# EAGLE board CT_schematic (EAGLE 7.6.0)

Size 100 x 80 mm. Coordinates in mm from the lower left corner, seen from the top.
Outline: 0,0 100,0 100,80 0,80 0,0
Copper layers (1*16): Top 0.035mm / dielectric 1.5mm / Bottom 0.035mm
Design rules "default": minimum track width 10mil, minimum drill 24mil, track to track 8mil, track to pad 8mil, pad to pad 8mil, via to via 8mil, smd to smd 8mil, copper to edge 40mil, drill to drill 8mil, minimum pad ring 10mil, minimum via ring 8mil, stop-mask expansion 4mil, vias tented up to drill 0mil, thermal gap 10mil

## Footprints (pad centres in the part's own frame; a part is rotated, then mirrored left to right if it is on the bottom)
C0603 = smd 0.8 x 0.8: 1 -0.762,0; 2 0.762,0
C0402 = smd 0.5 x 0.5: 1 -0.508,0; 2 0.508,0
C0805 = smd 1.2 x 1.3: 1 -1.016,0; 2 1.016,0
C1210 = smd 1.2 x 2.5: 1 -1.524,0; 2 1.524,0
EXV-9H = smd 3.505 x 1.676: 1 -2.857,0; 2 2.857,0
L0603 = smd 0.8 x 0.8: 1 -0.762,0; 2 0.762,0
L1210 = smd 1.2 x 2.5: 1 -1.524,0; 2 1.524,0
PJ-037B_PACKAGE = drill 3.7 square: 1 12,0 | drill 3.2 square: 2 6,0
R0603 = smd 0.8 x 0.8: 1 -0.762,0; 2 0.762,0
LQFP64 = smd 0.3 x 1.2: 1 -3.75,-5.75; 2 -3.25,-5.75; 3 -2.75,-5.75; 4 -2.25,-5.75; 5 -1.75,-5.75; 6 -1.25,-5.75; 7 -0.75,-5.75; 8 -0.25,-5.75; 9 0.25,-5.75; 10 0.75,-5.75; 11 1.25,-5.75; 12 1.75,-5.75; 13 2.25,-5.75; 14 2.75,-5.75; 15 3.25,-5.75; 16 3.75,-5.75; 33 3.75,5.75; 34 3.25,5.75; 35 2.75,5.75; 36 2.25,5.75; 37 1.75,5.75; 38 1.25,5.75; 39 0.75,5.75; 40 0.25,5.75; 41 -0.25,5.75; 42 -0.75,5.75; 43 -1.25,5.75; 44 -1.75,5.75; 45 -2.25,5.75; 46 -2.75,5.75; 47 -3.25,5.75; 48 -3.75,5.75 | smd 1.2 x 0.3: 17 5.75,-3.75; 18 5.75,-3.25; 19 5.75,-2.75; 20 5.75,-2.25; 21 5.75,-1.75; 22 5.75,-1.25; 23 5.75,-0.75; 24 5.75,-0.25; 25 5.75,0.25; 26 5.75,0.75; 27 5.75,1.25; 28 5.75,1.75; 29 5.75,2.25; 30 5.75,2.75; 31 5.75,3.25; 32 5.75,3.75; 49 -5.75,3.75; 50 -5.75,3.25; 51 -5.75,2.75; 52 -5.75,2.25; 53 -5.75,1.75; 54 -5.75,1.25; 55 -5.75,0.75; 56 -5.75,0.25; 57 -5.75,-0.25; 58 -5.75,-0.75; 59 -5.75,-1.25; 60 -5.75,-1.75; 61 -5.75,-2.25; 62 -5.75,-2.75; 63 -5.75,-3.25; 64 -5.75,-3.75
SOIC-8 = smd 1.6 x 0.6: 1 -2.7,1.905 | smd 1.55 x 0.6: 2 -2.7,0.635; 3 -2.7,-0.635; 4 -2.7,-1.905; 5 2.7,-1.905; 6 2.7,-0.635; 7 2.7,0.635; 8 2.7,1.905
TST-110-05-T-D-RA = drill 1 pad 1.7 square: 1 0,0 | drill 1 pad 1.7: 2 0,2.54; 3 2.54,0; 4 2.54,2.54; 5 5.08,0; 6 5.08,2.54; 7 7.62,0; 8 7.62,2.54; 9 10.16,0; 10 10.16,2.54; 11 12.7,0; 12 12.7,2.54; 13 15.24,0; 14 15.24,2.54; 15 17.78,0; 16 17.78,2.54; 17 20.32,0; 18 20.32,2.54; 19 22.86,0; 20 22.86,2.54
SSOP-20 = smd 1.651 x 0.432: 1 -3.48,2.925; 2 -3.48,2.275; 3 -3.48,1.625; 4 -3.48,0.975; 5 -3.48,0.325; 6 -3.48,-0.325; 7 -3.48,-0.975; 8 -3.48,-1.625; 9 -3.48,-2.275; 10 -3.48,-2.925; 11 3.48,-2.925; 12 3.48,-2.275; 13 3.48,-1.625; 14 3.48,-0.975; 15 3.48,-0.325; 16 3.48,0.325; 17 3.48,0.975; 18 3.48,1.625; 19 3.48,2.275; 20 3.48,2.925
182-009-MALE = drill 1.194 pad 1.524 octagon: 1 -5.537,10.923; 2 -2.769,10.923; 3 0,10.923; 4 2.769,10.923; 5 5.537,10.923; 6 -4.153,8.08; 7 -1.384,8.08; 8 1.384,8.08; 9 4.153,8.08 | hole 3.048: -12.446,9.501; 12.446,9.501
ABS07-32.768KHZ-7-T = smd 1.1 x 2.4: 1 -2.5,0; 2 0,0
ABLS-25.000MHZ-B2F-T = smd 5.6 x 2.8: 1 -3.81,0; 2 5.69,0
SOIC-8_EP = smd 1.6 x 0.533: 1 -2.921,1.905; 2 -2.921,0.635; 3 -2.921,-0.635; 4 -2.921,-1.905; 5 2.921,-1.905; 6 2.921,-0.635; 7 2.921,0.635; 8 2.921,1.905 | smd 2.54 x 3.302: EPAD 0,0 | drill 0.406 pad 0.406: P$1 -0.508,0.635; P$2 0.381,0.635; P$3 -0.508,-0.635; P$4 0.381,-0.635
SON-6 = smd 0.55 x 0.3: 1 -0.355,0.5 | smd 0.52 x 0.3: 2 -0.37,0; 3 -0.37,-0.5; 4 0.37,-0.5; 5 0.37,0; 6 0.37,0.5
SW_4-1437565-2 = smd 1.4 x 2.1: 1 -2.23,4.55; 2 -2.23,-4.55; 3 2.23,4.55; 4 2.23,-4.55
LGM67K-G1J2-24-Z = smd 0.8 x 1.4: A -2,0; C 0,0
NC7SZ125M5X = smd 1.3 x 0.7: 1 -1.3,0.95; 2 -1.3,0; 3 -1.3,-0.95; 4 1.3,-0.95; 5 1.3,0.95

## Placement (x,y rotation side)
C1  1e-06  [C0603]  -36.83,68.58 0 top  (outside the outline)
C2  1e-07  [C0603]  -40.64,68.58 0 top  (outside the outline)
C3  1e-07  [C0603]  -44.45,68.58 0 top  (outside the outline)
C4  1e-07  [C0603]  -48.26,68.58 0 top  (outside the outline)
C5  1e-07  [C0603]  -52.07,68.58 0 top  (outside the outline)
C6  1e-07  [C0603]  -55.88,68.58 0 top  (outside the outline)
C7  4.7e-06  [C0603]  -29.21,68.58 0 top  (outside the outline)
C8  2.2e-06  [C0603]  -33.02,68.58 0 top  (outside the outline)
C9  1e-08  [C0603]  -59.69,68.58 0 top  (outside the outline)
C10  1e-06  [C0603]  -63.5,68.58 0 top  (outside the outline)
C11  1e-11  [C0402]  -34.29,73.66 0 top  (outside the outline)
C12  1e-11  [C0402]  -38.1,73.66 0 top  (outside the outline)
C13  1e-11  [C0402]  -41.91,73.66 0 top  (outside the outline)
C14  1e-11  [C0402]  -45.72,73.66 0 top  (outside the outline)
C15  1e-08  [C0402]  -49.53,73.66 0 top  (outside the outline)
C16  1e-07  [C0402]  -53.34,73.66 0 top  (outside the outline)
C17  1e-06  [C0603]  -67.31,68.58 0 top  (outside the outline)
C18  1e-06  [C0603]  -71.12,68.58 0 top  (outside the outline)
C19  1e-06  [C0603]  -15.24,73.66 0 top  (outside the outline)
C20  4.7e-06  [C0805]  -72.39,55.88 0 top  (outside the outline)
C21  1e-05  [C1210]  -29.21,57.15 0 top  (outside the outline)
C22  1e-05  [C1210]  -35.56,57.15 0 top  (outside the outline)
C23  1e-05  [C1210]  -41.91,57.15 0 top  (outside the outline)
C24  1e-05  [C1210]  -48.26,57.15 0 top  (outside the outline)
C25  1e-07  [C0402]  -57.15,73.66 0 top  (outside the outline)
C26  0.0001  [EXV-9H]  -64.77,39.37 0 top  (outside the outline)
C27  0.0001  [EXV-9H]  -17.78,49.53 0 top  (outside the outline)
C28  1e-08  [C0402]  -60.96,73.66 0 top  (outside the outline)
C29  1e-08  [C0402]  -64.77,73.66 0 top  (outside the outline)
F1  240.0  [L0603]  -19.05,73.66 0 top  (outside the outline)
I1  1.5e-05  [L1210]  -54.61,57.15 0 top  (outside the outline)
J1  PJ-037B  [PJ-037B_PACKAGE]  -67.31,7.62 0 top  (outside the outline)
R2  1000.0  [R0603]  -22.86,73.66 0 top  (outside the outline)
R4  4700.0  [R0603]  -26.67,73.66 0 top  (outside the outline)
R5  10000.0  [R0603]  -49.53,63.5 0 top  (outside the outline)
R6  10000.0  [R0603]  -54.61,63.5 0 top  (outside the outline)
R7  10000.0  [R0603]  -59.69,63.5 0 top  (outside the outline)
R8  10000.0  [R0603]  -64.77,63.5 0 top  (outside the outline)
R9  10000.0  [R0603]  -69.85,63.5 0 top  (outside the outline)
R10  100000.0  [R0603]  -24.13,63.5 0 top  (outside the outline)
R11  100000.0  [R0603]  -29.21,63.5 0 top  (outside the outline)
R12  100000.0  [R0603]  -34.29,63.5 0 top  (outside the outline)
R13  1402.2764227642  [R0603]  -19.05,63.5 0 top  (outside the outline)
R14  2200.0  [R0603]  -30.48,73.66 0 top  (outside the outline)
R15  10000.0  [R0603]  -15.24,68.58 0 top  (outside the outline)
R16  10000.0  [R0603]  -20.32,68.58 0 top  (outside the outline)
R17  82000.0  [R0603]  -25.4,68.58 0 top  (outside the outline)
R18  300000.0  [R0603]  -39.37,63.5 0 top  (outside the outline)
R19  120000.0  [R0603]  -44.45,63.5 0 top  (outside the outline)
U1  STM32F410RBT6  [LQFP64]  -24.13,29.21 0 top  (outside the outline)
U2  AT25128B-SSHL-T  [SOIC-8]  -62.23,27.94 0 top  (outside the outline)
U3  TST-110-05-T-D-RA  [TST-110-05-T-D-RA]  -57.15,38.1 0 top  (outside the outline)
U4  MAX3218EAP+T  [SSOP-20]  -17.78,40.64 0 top  (outside the outline)
U5  182-009-113R531  [182-009-MALE]  -36.83,6.35 0 top  (outside the outline)
U6  ABS07-32.768KHZ-7-T  [ABS07-32.768KHZ-7-T]  -59.69,49.53 0 top  (outside the outline)
U7  ABLS-25.000MHZ-B2F-T  [ABLS-25.000MHZ-B2F-T]  -36.83,49.53 0 top  (outside the outline)
U8  MIC5234YME  [SOIC-8_EP]  -68.58,48.26 0 top  (outside the outline)
U9  TPS3895ADRYR  [SON-6]  -67.31,72.39 0 top  (outside the outline)
U10  4-1437565-2  [SW_4-1437565-2]  -45.72,27.94 0 top  (outside the outline)
U11  Q65110A2395  [LGM67K-G1J2-24-Z]  -17.78,57.15 0 top  (outside the outline)
U12  nc7sz125m5x  [NC7SZ125M5X]  -59.69,55.88 0 top  (outside the outline)
U13  nc7sz125m5x  [NC7SZ125M5X]  -66.04,55.88 0 top  (outside the outline)

## Library data of the parts
C1-C29 F1 I1 J1 R2 R4-R19 U1-U13 = circuit_tree

## Nets
CLK_CRYSTAL_U1_3: C11.1 U1.3 U6.1
CLK_CRYSTAL_U1_4: C12.1 U1.4 U6.2
CLK_CRYSTAL_U1_5: C13.1 U1.5 U7.1
CLK_CRYSTAL_U1_6: C14.1 U1.6 U7.2
GND: C1.2 C2.2 C3.2 C4.2 C5.2 C6.2 C7.2 C8.2 C9.2 C10.2 C11.2 C12.2 C13.2 C14.2 C15.2 C16.2 C17.2 C18.2 C19.2 C21.2 C22.2 C23.2 C24.2 C25.2 C26.2 C27.2 C28.2 C29.2 J1.2 R2.2 R5.2 R14.2 R17.2 R19.2 U1.12 U1.18 U1.31 U1.47 U1.63 U2.4 U3.4 U3.6 U3.8 U3.10 U3.12 U3.14 U3.16 U3.18 U3.20 U4.5 U4.17 U4.20 U5.5 U8.7 U8.EPAD U9.2 U11.C U12.2 U12.3 U13.1 U13.3
NET_U1_7: R4.1 U1.7 U13.4
NET_U1_13: C9.1 C10.1 F1.1 U1.13
NET_U1_30: C8.1 U1.30
NET_U1_60: R5.1 U1.60
NET_U1_61: U11.A
NET_U1_62: U10.3 U10.4
NET_U2_3: R6.1 U2.3
NET_U2_7: R8.1 U2.7
NET_U4_1: I1.1 U4.1
NET_U4_2: R10.1 U4.2
NET_U4_3: R11.1 U4.3
NET_U4_4: R12.1 U4.4
NET_U4_15: C19.1 U4.15
NET_U4_16: C20.2 U4.16
NET_U4_18: C20.1 U4.18
NET_U4_19: C18.1 U4.19
NET_U5_2: U4.12 U5.2
NET_U5_3: U4.14 U5.3
NET_U5_7: U4.11 U5.7
NET_U5_8: U4.13 U5.8
NET_U8_4: R13.2 R14.1 U8.4
NET_U9_1: R16.1 R17.1 U9.1
NET_U9_3: R18.2 R19.1 U9.3
NET_U9_4: R15.1 U9.4 U12.4 U13.2
NET_U10_1: R2.1 U10.1 U10.2
PROC_SPI1_MISO: U1.22 U2.2
PROC_SPI1_MOSI: U1.23 U2.5
PROC_SPI1_NSS: R7.1 U1.20 U2.1
PROC_SPI1_SCK: U1.21 U2.6
PROC_SYS_JTCK_SWCLK: U1.49 U3.9
PROC_SYS_JTDO_SWO: U1.55 U3.13
PROC_SYS_JTMS_SWDIO: U1.46 U3.7
PROC_USART1_CTS: U1.44 U4.8
PROC_USART1_RTS: U1.45 U4.10
PROC_USART1_RX: U1.43 U4.9
PROC_USART1_TX: U1.42 U4.7
RST_OUT_U3_SRESET_B: R9.1 U3.15 U12.1
VCC_S1_9V9: C21.1 C22.1 C26.1 C27.1 J1.1 U8.5 U8.8
VCC_TIER1_1V8: C1.1 C2.1 C3.1 C4.1 C5.1 C6.1 C7.1 C15.1 C16.1 C17.1 C23.1 C24.1 C25.1 C28.1 C29.1 F1.2 I1.2 R4.2 R6.2 R7.2 R8.2 R9.2 R10.2 R11.2 R12.2 R13.1 R15.2 R16.2 R18.1 U1.1 U1.19 U1.32 U1.48 U1.64 U2.8 U3.1 U4.6 U8.1 U9.6 U12.5 U13.5

## Tracks (layer width: path | path; a pad name or v marks a point on that pad's centre or on a via)
CLK_CRYSTAL_U1_3  (2 unrouted)
CLK_CRYSTAL_U1_4  (2 unrouted)
CLK_CRYSTAL_U1_5  (2 unrouted)
CLK_CRYSTAL_U1_6  (2 unrouted)
GND  (60 unrouted)
NET_U1_7  (2 unrouted)
NET_U1_13  (3 unrouted)
NET_U1_30  (1 unrouted)
NET_U1_60  (1 unrouted)
NET_U1_62  (1 unrouted)
NET_U2_3  (1 unrouted)
NET_U2_7  (1 unrouted)
NET_U4_1  (1 unrouted)
NET_U4_2  (1 unrouted)
NET_U4_3  (1 unrouted)
NET_U4_4  (1 unrouted)
NET_U4_15  (1 unrouted)
NET_U4_16  (1 unrouted)
NET_U4_18  (1 unrouted)
NET_U4_19  (1 unrouted)
NET_U5_2  (1 unrouted)
NET_U5_3  (1 unrouted)
NET_U5_7  (1 unrouted)
NET_U5_8  (1 unrouted)
NET_U8_4  (2 unrouted)
NET_U9_1  (2 unrouted)
NET_U9_3  (2 unrouted)
NET_U9_4  (3 unrouted)
NET_U10_1  (2 unrouted)
PROC_SPI1_MISO  (1 unrouted)
PROC_SPI1_MOSI  (1 unrouted)
PROC_SPI1_NSS  (2 unrouted)
PROC_SPI1_SCK  (1 unrouted)
PROC_SYS_JTCK_SWCLK  (1 unrouted)
PROC_SYS_JTDO_SWO  (1 unrouted)
PROC_SYS_JTMS_SWDIO  (1 unrouted)
PROC_USART1_CTS  (1 unrouted)
PROC_USART1_RTS  (1 unrouted)
PROC_USART1_RX  (1 unrouted)
PROC_USART1_TX  (1 unrouted)
RST_OUT_U3_SRESET_B  (2 unrouted)
VCC_S1_9V9  (6 unrouted)
VCC_TIER1_1V8  (40 unrouted)